# Altium PCB PCB Layout.PCBDOC
Units mil, origin at the board's own origin, x right, y up, seen from the top; angles counter-clockwise.
Board outline 4670 x 3220 mil, 2 copper layers (Top Layer, Bottom Layer); 42 components, 89 nets, 292 pads, 33 vias.
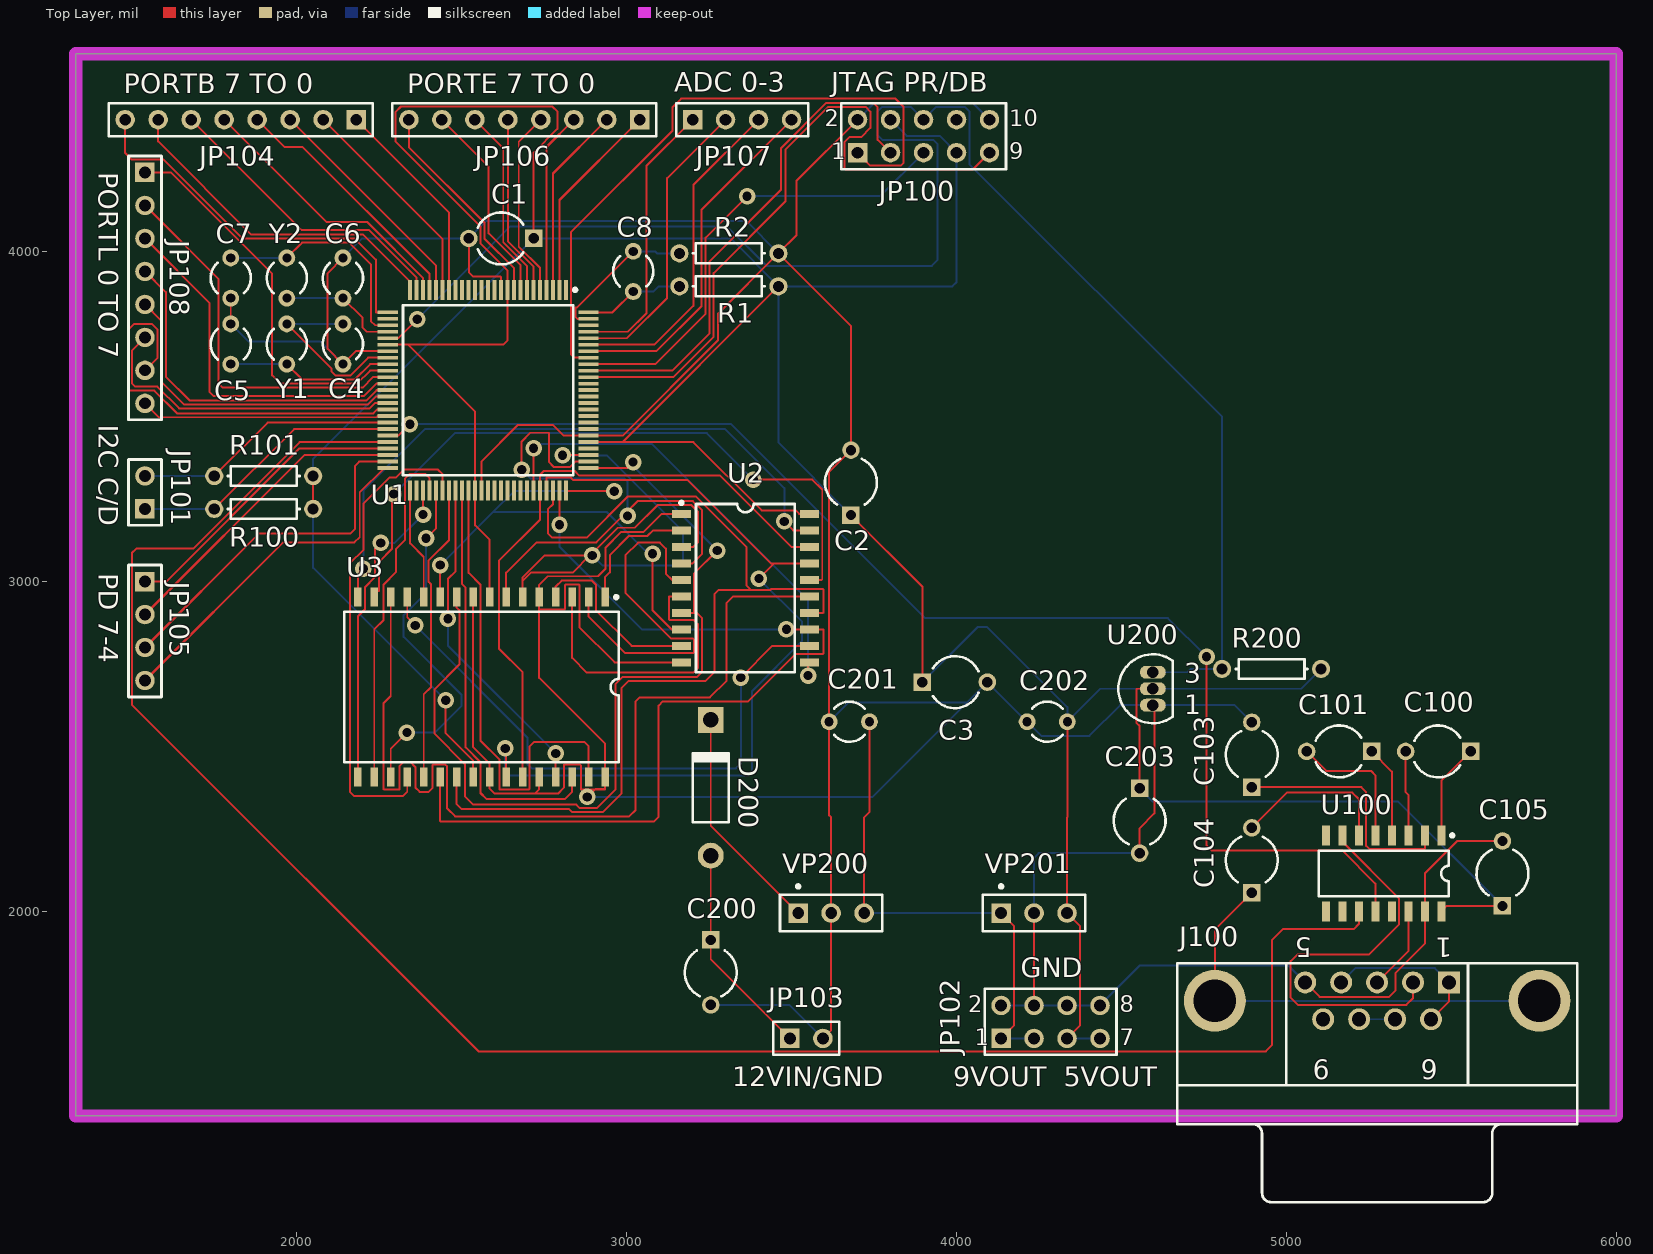
[diagram p0: Top Layer view]
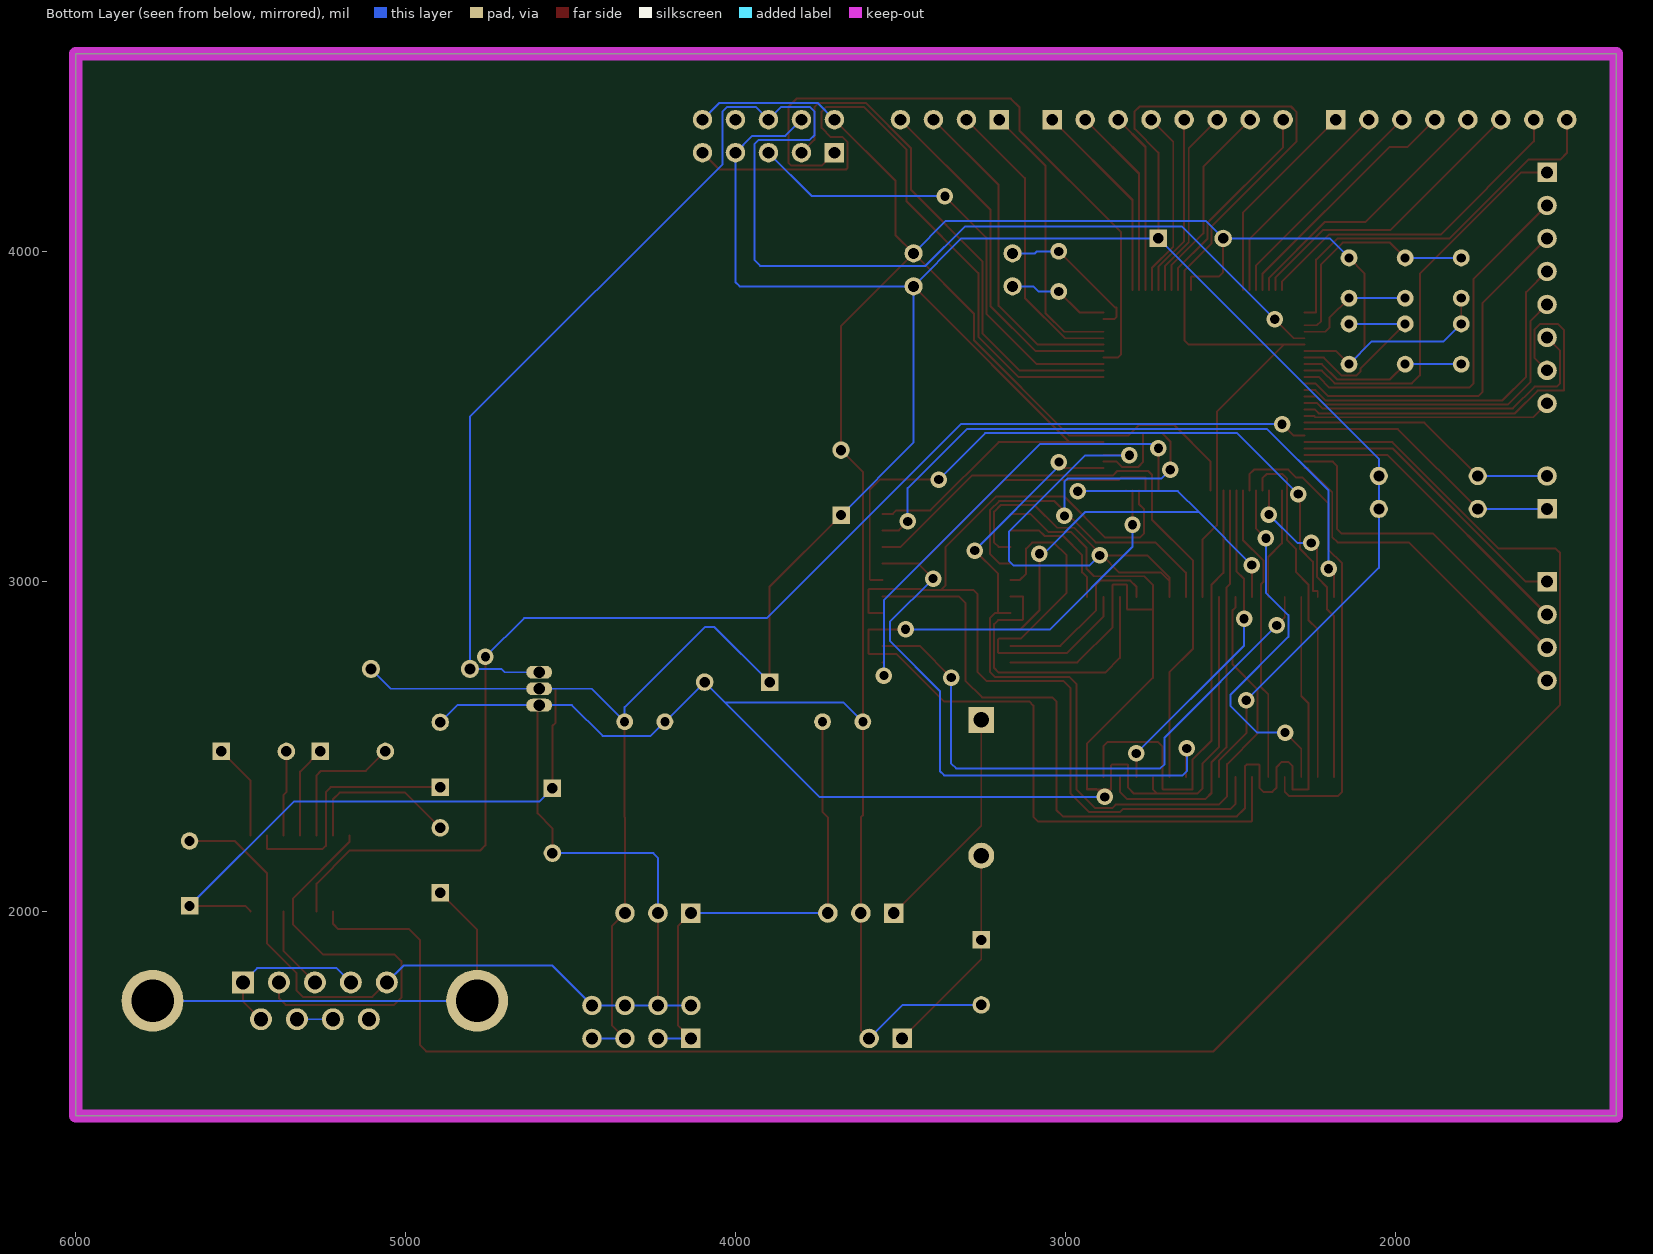
[diagram p1: Bottom Layer view, seen from below]

## Layer stack, top to bottom
Top Layer: signal copper 1.4
Dielectric: core 12.6, FR-4, Dk 4.8
Bottom Layer: signal copper 1.4

## Board outline
6000,4600 1330,4600 1330,1380 6000,1380

## Design rules (kind name [scope] priority, off if disabled: settings)
Clearance [All] p1: gap=6
ComponentClearance [All] p1: gap=10 collisioncheckmode=0
PolygonConnect [All] p1: connectstyle=Relief reliefconductorwidth=10 reliefentries=4 polygonreliefangle="90 Angle"
RoomDefinition "Interfaces and Connectors" [InComponentClass('Interfaces and Connectors')] p1 off: confinementstyle=ConfineIn formatcopy=TRUE outline 80,55 930,55 930,340 80,340
RoomDefinition "Power Regulation and Protection" [InComponentClass('Power Regulation and Protection')] p2 off: confinementstyle=ConfineIn formatcopy=TRUE outline 2050,75 3020,75 3020,270 2050,270
RoomDefinition "Microcontroller and Memory" [InComponentClass('Microcontroller and Memory')] p3 off: confinementstyle=ConfineIn formatcopy=TRUE outline 1015,60 2000,60 2000,245 1015,245
RoutingLayers [All] p1: top layer="Not Used" bottom layer="Not Used"
RoutingVias [All] p1: holewidth=28 width=50 viastyle="Through Hole" minholewidth=28 minwidth=50 maxholewidth=28 maxwidth=50
SolderMaskExpansion [All] p1: expansion=4
TestPointUsage [All] p1: valid=0 allowmultiple=FALSE
Testpoint [All] p1: side=15 testpointundercomponent=TRUE minsize=40 maxsize=100 preferedsize=60 minholesize=0 maxholesize=40 preferedholesize=32 testpointgrid=1 style=1023 order=-539222988
Width [All] p1: maxlimit=10 minlimit=6 preferedwidth=10 toplayer_maxwidth=6 toplayer_prefwidth=6 bottomlayer_maxwidth=6 bottomlayer_prefwidth=6 minimp=50.000000 maximp=50.000000 favimp=50.000000
16 further rules are at their usual default settings.

## Classes and differential pairs
component class "Interfaces and Connectors": C100 C101 C103 C104 C105 J100 JP100 JP101 JP102 JP103 JP104 JP105 JP106 JP107 JP108 R100 R101 U100
component class "Microcontroller and Memory": C1 C2 C3 C4 C5 C6 C7 C8 R1 R2 U1 U2 U3 Y1 Y2
component class "Power Regulation and Protection": C200 C201 C202 C203 D200 R200 U200 VP200 VP201
net class A[8..15]: A0 A1 A2 A3 A4 A5 A6 A7 A8 A9 A10 A11 A12 A13 A14 A15
net class AD[0..7]: AD0 AD1 AD2 AD3 AD4 AD5 AD6 AD7

## Components (designator, comment, footprint, x,y, rotation, side; value= is the part's Value field where it differs from the comment)
C1 "Cap Tant" CAPR5-4X5 2620,4040 r180 top
C2 "Cap Tant" CAPR5-4X5 3680,3300 r90 top
C3 "Cap Tant" CAPR5-4X5 3995,2695 r0 top
C4 "22pF" BCY-W2/D3.1 2140,3720 r180 top
C5 "22pF" BCY-W2/D3.1 1800,3720 r0 top
C6 "22pF" BCY-W2/D3.1 2140,3920 r0 top
C7 "22pF" BCY-W2/D3.1 1800,3920 r180 top
C8 "100nF" BCY-W2/D3.1 3020,3940 r180 top
C100 "Cap Elec" CAPR5-4X5 5460,2485 r180 top
C101 "Cap Elec" CAPR5-4X5 5160,2485 r180 top
C103 "Cap Elec" CAPR5-4X5 4895,2475 r90 top
C104 "Cap Elec" CAPR5-4X5 4895,2155 r90 top
C105 "Cap Elec" CAPR5-4X5 5655,2115 r90 top
C200 "Cap Elec" CAPR5-4X5 3255,1815 r270 top
C201 "100nF" BCY-W2/D3.1 3675,2575 r90 top
C202 "100nF" BCY-W2/D3.1 4275,2575 r90 top
C203 "Cap Elec" CAPR5-4X5 4555,2275 r270 top
D200 "1N4004" DIO10.46-5.3x2.8 3255,2375 r90 top
J100 "RS-232" DSUB1.385-2H9 5275,1355 r180 top
JP100 "JTAG" HDR2X5 3700,4300 r0 top
JP101 "I2C" HDR1X2 1540,3220 r90 top
JP102 "Voltage Outputs" HDR2X4 4135,1615 r0 top
JP103 "Voltage Input" HDR1X2 3495,1615 r0 top
JP104 "PORTB" HDR1X8 2180,4400 r180 top
JP105 "PORTD" HDR1X4 1540,3000 r270 top
JP106 "PORTE" HDR1X8 3040,4400 r180 top
JP107 "ADC Inputs" HDR1X4 3200,4400 r0 top
JP108 "PORTL" HDR1X8 1540,4240 r270 top
R1 "0K" AXIAL-0.3 3310,3895 r0 top
R2 "0K" AXIAL-0.3 3310,3995 r180 top
R100 "10K" AXIAL-0.3 1900,3220 r0 top
R101 "10K" AXIAL-0.3 1900,3320 r0 top
R200 "10K" AXIAL-0.3 4955,2735 r0 top
U1 "ATmega2560" F-QFP14X14-G100/Z17N 2580,3580 r270 top
U2 "74373" SO-G20/Y1.45 3360,2980 r270 top
U3 "K6R1008C1D" SO-G32/Y1.45 2560,2680 r180 top
U100 "MAX232" SO-G16/C5.85 5295,2115 r180 top
U200 "ZM33064" BCY-W3 4595,2675 r0 top
VP200 "7809" PIN3 3520,1995 r0 top
VP201 "7805" PIN3 4135,1995 r0 top
Y1 "16MHz" BCY-W2/D3.1 1970,3720 r0 top
Y2 "32kHz" BCY-W2/D3.1 1970,3920 r180 top

## Footprints (in the part's own frame and the unit in brackets; to place one, negate y for a bottom-side part, rotate by r counter-clockwise, add the part's x,y. Pads: shape width x height; smd on the part's side, far side on the other; paste and mask are expansions set on the pad)
AXIAL-0.3 [mm]
  round 1.4 hole 0.85: 1(-3.81,0) 2(3.81,0)
  silkscreen extent -2.77,-0.76 2.77,0.76
BCY-W2/D3.1 [mm]
  round 1.3 hole 0.7: 1(0,1.55) 2(0,-1.55)
  silkscreen extent -1.55,-1.19 1.55,1.17
BCY-W3 [mm]
  oval 2x1 hole 0.9: 1(0,-1.27) 2(0,0) 3(0,1.27)
  silkscreen extent -2.65,-2.65 1.55,2.65
CAPR5-4X5 [mm]
  rect 1.35x1.35 hole 0.8: 1(-2.5,0)
  round 1.35 hole 0.8: 2(2.5,0)
  silkscreen extent -1.69,-2 1.82,2
DIO10.46-5.3x2.8 [mm]
  round 2 hole 1.2: 1(-5.23,0)
  rect 2x2 hole 1.2: 2(5.23,0)
  silkscreen extent -2.65,-1.4 2.75,1.41
DSUB1.385-2H9 [mm] "Connector; D Subminiature; 9 Position; Right Angle; Pitch 1.385 mm"
  rect 1.69x1.69 hole 1.09: 1(-5.54,-10.92)
  round 1.69 hole 1.09: 2(-2.77,-10.92) 3(0,-10.92) 4(2.77,-10.92) 5(5.54,-10.92) 6(-4.155,-8.08) 7(-1.385,-8.08) 8(1.385,-8.08) 9(4.155,-8.08)
  round 4.76 hole 3.26: 10(-12.495,-9.5) 11(12.495,-9.5)
  silkscreen extent -15.4,-12.4 15.4,6
F-QFP14X14-G100/Z17N [mm]
  rect 1.55x0.3 smd: 1(-7.725,6) 2(-7.725,5.5) 3(-7.725,5) 4(-7.725,4.5) 5(-7.725,4) 6(-7.725,3.5) 7(-7.725,3) 8(-7.725,2.5) 9(-7.725,2) 10(-7.725,1.5) 11(-7.725,1) 12(-7.725,0.5) 13(-7.725,0) 14(-7.725,-0.5) 15(-7.725,-1) 16(-7.725,-1.5) 17(-7.725,-2) 18(-7.725,-2.5) 19(-7.725,-3) 20(-7.725,-3.5) 21(-7.725,-4) 22(-7.725,-4.5) 23(-7.725,-5) 24(-7.725,-5.5) 25(-7.725,-6) 51(7.725,-6) 52(7.725,-5.5) 53(7.725,-5) 54(7.725,-4.5) 55(7.725,-4) 56(7.725,-3.5) 57(7.725,-3) 58(7.725,-2.5) 59(7.725,-2) 60(7.725,-1.5) 61(7.725,-1) 62(7.725,-0.5) 63(7.725,0) 64(7.725,0.5) 65(7.725,1) 66(7.725,1.5) 67(7.725,2) 68(7.725,2.5) 69(7.725,3) 70(7.725,3.5) 71(7.725,4) 72(7.725,4.5) 73(7.725,5) 74(7.725,5.5) 75(7.725,6)
  rect 0.3x1.55 smd: 26(-6,-7.725) 27(-5.5,-7.725) 28(-5,-7.725) 29(-4.5,-7.725) 30(-4,-7.725) 31(-3.5,-7.725) 32(-3,-7.725) 33(-2.5,-7.725) 34(-2,-7.725) 35(-1.5,-7.725) 36(-1,-7.725) 37(-0.5,-7.725) 38(0,-7.725) 39(0.5,-7.725) 40(1,-7.725) 41(1.5,-7.725) 42(2,-7.725) 43(2.5,-7.725) 44(3,-7.725) 45(3.5,-7.725) 46(4,-7.725) 47(4.5,-7.725) 48(5,-7.725) 49(5.5,-7.725) 50(6,-7.725) 76(6,7.725) 77(5.5,7.725) 78(5,7.725) 79(4.5,7.725) 80(4,7.725) 81(3.5,7.725) 82(3,7.725) 83(2.5,7.725) 84(2,7.725) 85(1.5,7.725) 86(1,7.725) 87(0.5,7.725) 88(0,7.725) 89(-0.5,7.725) 90(-1,7.725) 91(-1.5,7.725) 92(-2,7.725) 93(-2.5,7.725) 94(-3,7.725) 95(-3.5,7.725) 96(-4,7.725) 97(-4.5,7.725) 98(-5,7.725) 99(-5.5,7.725) 100(-6,7.725)
  silkscreen extent -7.85,-6.55 6.55,6.83
HDR1X2 [mm]
  rect 1.5x1.5 hole 0.9: 1(0,0)
  round 1.5 hole 0.9: 2(2.54,0)
  silkscreen extent -1.27,-1.27 3.81,1.27
HDR1X4 [mm]
  rect 1.5x1.5 hole 0.9: 1(0,0)
  round 1.5 hole 0.9: 2(2.54,0) 3(5.08,0) 4(7.62,0)
  silkscreen extent -1.27,-1.27 8.89,1.27
HDR1X8 [mm]
  rect 1.5x1.5 hole 0.9: 1(0,0)
  round 1.5 hole 0.9: 2(2.54,0) 3(5.08,0) 4(7.62,0) 5(10.16,0) 6(12.7,0) 7(15.24,0) 8(17.78,0)
  silkscreen extent -1.27,-1.27 19.05,1.27
HDR2X4 [mm]
  rect 1.5x1.5 hole 0.9: 1(0,0)
  round 1.5 hole 0.9: 2(0,2.54) 3(2.54,0) 4(2.54,2.54) 5(5.08,0) 6(5.08,2.54) 7(7.62,0) 8(7.62,2.54)
  silkscreen extent -1.27,-1.27 8.89,3.81
HDR2X5 [mm]
  rect 1.5x1.5 hole 0.9: 1(0,0)
  round 1.5 hole 0.9: 2(0,2.54) 3(2.54,0) 4(2.54,2.54) 5(5.08,0) 6(5.08,2.54) 7(7.62,0) 8(7.62,2.54) 9(10.16,0) 10(10.16,2.54)
  silkscreen extent -1.27,-1.27 11.43,3.81
PIN3 [mm]
  rect 1.5x1.5 hole 0.9: 1(0,0)
  oval 1.51x1.5 hole 0.9: 2(2.54,0)
  round 1.5 hole 0.9: 3(5.08,0)
  silkscreen extent -1.4,-1.4 6.48,2.17
SO-G16/C5.85 [mm]
  rect 0.6x1.55 smd: 1(-4.445,-2.925) 2(-3.175,-2.925) 3(-1.905,-2.925) 4(-0.635,-2.925) 5(0.635,-2.925) 6(1.905,-2.925) 7(3.175,-2.925) 8(4.445,-2.925) 9(4.445,2.925) 10(3.175,2.925) 11(1.905,2.925) 12(0.635,2.925) 13(-0.635,2.925) 14(-1.905,2.925) 15(-3.175,2.925) 16(-4.445,2.925)
  silkscreen extent -5.4,-3.05 5,1.75
SO-G20/Y1.45 [mm]
  rect 0.6x1.45 smd: 1(-5.715,-4.925) 2(-4.445,-4.925) 3(-3.175,-4.925) 4(-1.905,-4.925) 5(-0.635,-4.925) 6(0.635,-4.925) 7(1.905,-4.925) 8(3.175,-4.925) 9(4.445,-4.925) 10(5.715,-4.925) 11(5.715,4.925) 12(4.445,4.925) 13(3.175,4.925) 14(1.905,4.925) 15(0.635,4.925) 16(-0.635,4.925) 17(-1.905,4.925) 18(-3.175,4.925) 19(-4.445,4.925) 20(-5.715,4.925)
  silkscreen extent -6.69,-5.05 6.47,3.8
SO-G32/Y1.45 [mm]
  rect 0.6x1.45 smd: 1(-9.525,-6.925) 2(-8.255,-6.925) 3(-6.985,-6.925) 4(-5.715,-6.925) 5(-4.445,-6.925) 6(-3.175,-6.925) 7(-1.905,-6.925) 8(-0.635,-6.925) 9(0.635,-6.925) 10(1.905,-6.925) 11(3.175,-6.925) 12(4.445,-6.925) 13(5.715,-6.925) 14(6.985,-6.925) 15(8.255,-6.925) 16(9.525,-6.925) 17(9.525,6.925) 18(8.255,6.925) 19(6.985,6.925) 20(5.715,6.925) 21(4.445,6.925) 22(3.175,6.925) 23(1.905,6.925) 24(0.635,6.925) 25(-0.635,6.925) 26(-1.905,6.925) 27(-3.175,6.925) 28(-4.445,6.925) 29(-5.715,6.925) 30(-6.985,6.925) 31(-8.255,6.925) 32(-9.525,6.925)
  silkscreen extent -10.58,-7.05 10.58,5.8

## Part data
C1 C2 C3 C100 C101 C103 C104 C105 C200 C203: library part "Cap Pol2", "Polarized Capacitor (Axial)"
C4 C5 C6 C7 C8 C201 C202: library part Cap, "Capacitor"
D200: library part "D Zener", "Zener Diode"
J100: library part "D Connector 9", "Receptacle Assembly, 9 Position, Right Angle"
JP100: library part "Header 5X2", "Header, 5-Pin, Dual row"
JP101 JP103: library part "Header 2", "Header, 2-Pin"
JP102: library part "Header 4X2", "Header, 4-Pin, Dual row"
JP104 JP106 JP108: library part "Header 8", "Header, 8-Pin"
JP105 JP107: library part "Header 4", "Header, 4-Pin"
R1 R2 R100 R101 R200: library part Res1, "Resistor"
U1: "Atmel ATmega2560 MCU"
U2: "Octal 8-bit D-type Latch"
U3: library part K6R1016C1D, "Samsung 128kBit High-Speed Static RAM"
U100: "Maxim RS-232 Transceiver"
U200: "Generic 5V Supply Voltage Monitor"
VP200: library part 7805, "Generic 6V Voltage Regulator"
VP201: "Generic 6V Voltage Regulator"
Y1 Y2: library part XTAL, "Crystal Oscillator"

## Via types
v1: diameter 50, hole 28, Top Layer to Bottom Layer, 33 vias

## Nets (pads, with @x,y where several pads share a name; then routed paths per layer and width w, separated by ;. In a path a pad name is that pad's centre, name@x,y a point inside that pad or via, vN(x,y) a via of type N, cw(c..) or ccw(c..) an arc to the next point about the centre after c; other vN are vias at no path point)
5V: C1.1 C2.1 C3.1 C105.1 C202.2 C203.1 JP100.4 JP100.7 JP102.5 JP102.7 R1.2 R100.2 R101.2 R200.2 U1.10 U1.31 U1.61 U1.80 U2.20 U3.8 U3.24 U100.16 U200.2 VP201.3 | length 14361.8
  Top Layer w6: R100.2 R101.2 ; U1.31 2337.83,3717.8 ; v1(2451.5,2640) 2451.5,2540.53 2535,2457.03 U3.24 ; U3.8 2585,3126 2540.63,3170.37 U1.61 2540.63,3515 2337.83,3717.8 ; C1.1 2718.43,4300.43 2790,4372 2790,4425 2775,4440 2316,4440 2300,4424 2300,4333.15 2557.15,4076 2557.15,4023.91 2639.06,3942 U1.10 2639.06,3731.06 2625.8,3717.8 2337.83,3717.8 ; U1.80 2987.52,3422.52 ; R1.2 2987.52,3422.52 ; U2.20 3523,3205 3512,3216 3409,3216 3202.48,3422.52 2987.52,3422.52 ; C2.1 3896.57,2985 C3.1 ; JP102.5 4374,1654 4374,1956 VP201.3 4335,2285 4336.02,2286.02 C202.2 ; C203.1 4555,2562 4546,2571 4546,2674 4547,2675 U200.2 ; U100.16 5486.73,2016.57 C105.1
  Bottom Layer w6: v1(2451.5,2640) 2050,3041.5 R100.2 R101.2 2050,3371.57 C1.1 3315,4040 R1.2 ; C2.1 3460,3421.57 R1.2 ; JP100.4 3849,4351 3949,4351 JP100.7 4000,3907.5 3987.5,3895 R1.2 ; C3.1 4063.57,2862 4093,2862 4336.02,2618.98 C202.2 4436.02,2675 U200.2 5045,2675 R200.2 ; JP102.5 JP102.7 ; C203.1 4595.43,2333 5338.57,2333 C105.1
9V: C201.2 JP102.1 JP102.3 VP200.3 VP201.1 | length 1513.9
  Top Layer w6: VP200.3 3720,2285 3736.02,2301.02 C201.2 ; JP102.1 4174,1654 4174,1956 VP201.1
  Bottom Layer w6: VP200.3 VP201.1 ; JP102.1 JP102.3
"10-12V IN": C200.1 D200.1 JP103.1 | length 653.5
  Top Layer w6: D200.1 C200.1 3255,1855 JP103.1
A0: U2.2 U3.1 | length 381.3
  Top Layer w6: U3.1 2935,3013.81 2949,3027.81 2949,3080 3007,3138 3063.08,3138 3080.08,3155 U2.2
A1: U2.5 U3.2 | length 1121.3
  Top Layer w6: U3.2 2885,2893.5 2995.5,2783 3201.65,2783 3203.65,2785 3203.65,2825 3201.65,2827 3135,2827 2996,2966 2996,3079 3035,3118 3101,3118 3119,3100 3119,3023.5 3137.5,3005 U2.5
A2: U2.6 U3.3 | length 922.7
  Top Layer w6: U3.3 2835,2768.5 2879.5,2724 3202.15,2724 3216,2737.85 3216,2871 3204,2883 3130.56,2883 3128.56,2885 3128.56,2954 3129.56,2955 U2.6
A3: U2.9 U3.4 | length 548.6
  Top Layer w6: U3.4 2785,2985 2803,3003 2895,3003 2907,2991 2907,2913 3015,2805 U2.9
A4: U2.12 U3.13 | length 1823.8
  Top Layer w6: U3.13 2335,2891.5 v1(2359.5,2867) ; v1(3346,2709) 3442,2805 U2.12
  Bottom Layer w6: v1(2359.5,2867) 2699.24,2527.26 2699.24,2446.63 2712.5,2433.38 3331.38,2433.38 3346,2448 v1(3346,2709)
A5: U2.15 U3.14 | length 2853.9
  Top Layer w6: U3.14 2285,2653 2263,2631 2263,2371 2265,2369 2310,2369 2311,2370 2311,2439.61 2325,2453.61 2343.89,2453.61 2360,2437.5 2360,2375 2372.5,2362.5 2399.5,2362.5 2412,2375 2412,2444 2413,2445 2450.5,2445 2456,2439.5 2456,2312 2480,2288 3007.5,2288 3027,2307.5 3027,2636.5 3039.5,2649 3252.5,2649 3303,2699.5 3303,2935 3323,2955 U2.15
A6: U2.16 U3.15 | length 2103.4
  Top Layer w6: U3.15 2235,2972 2249,2972 2250,2973 2250,3060.1 2288.5,3098.6 2288.5,3259.5 v1(2294,3265) ; v1(3384,3309) 3563,3309 3593,3279 3593,3007 3591,3005 U2.16
  Bottom Layer w6: v1(2294,3265) 2479,3450 3243,3450 v1(3384,3309)
A7: U2.19 U3.16 | length 1946.5
  Top Layer w6: U3.16 2185,3022 v1(2202,3039) ; v1(3478,3182) 3505,3155 U2.19
  Bottom Layer w6: v1(2202,3039) 2202,3276 2389,3463 3298,3463 3478,3283 v1(3478,3182)
A8: U1.53 U3.17 | length 975.5
  Top Layer w6: U3.17 2185,2894 2207,2916 2207,2983 2237,3013 2237,3099.5 v1(2254.5,3117) ; v1(2383.15,3203.15) U1.53
  Bottom Layer w6: v1(2254.5,3117) 2297,3117 v1(2383.15,3203.15)
A9: U1.54 U3.18 | length 1065.8
  Top Layer w6: U3.18 2235,2855 2263,2883 2263,2990.62 2300.5,3028.12 2300.5,3097.96 2328.87,3126.33 2328.87,3312.5 2342.37,3326 2389.33,3326 2402.83,3312.5 U1.54
A10: U1.55 U3.19 | length 1120.5
  Top Layer w6: U3.19 2285,2493 v1(2334,2542) ; v1(2392,3131) 2422.52,3161.52 U1.55
  Bottom Layer w6: v1(2334,2542) 2418,2542 2500,2624 2500,2656 2324,2832 2324,2898 2392,2966 v1(2392,3131)
A11: U1.56 U3.20 | length 1457.6
  Top Layer w6: U3.20 2335,2362.5 2322.5,2350 2173.5,2350 2161,2362.5 2161,3055 2203,3097 2203,3237.24 2280.76,3315 2300,3315 2324,3339 2428.2,3339 2442.2,3325 U1.56
A12: U1.57 U3.21 | length 906.2
  Top Layer w6: U3.21 2385,2658 2407,2680 2407,2992 2400,2999 2400,3064 2461.89,3125.89 U1.57
A13: U1.58 U3.29 | length 1013.3
  Top Layer w6: v1(2458.5,2887) 2458.5,3008.5 2481.57,3031.57 U1.58 ; U3.29 v1(2785,2479)
  Bottom Layer w6: v1(2458.5,2887) 2458.5,2805.5 v1(2785,2479)
A14: U1.59 U3.30 | length 1279.2
  Top Layer w6: U1.59 2501.26,2992 2512,2981.26 2512,2497 2557,2452 2557,2359 2575,2341 2813.5,2341 2835,2362.5 U3.30
A15: U1.60 U3.31 | length 1448.3
  Top Layer w6: U1.60 2520.94,3026.06 2557,2990 2557,2517.61 2614,2460.61 2614,2371.19 2615.37,2369.82 2704.63,2369.82 2706,2371.19 2706,2500 2719.81,2513.81 2871.19,2513.81 2885,2500 U3.31
AD0: U1.78 U2.3 U3.6 | length 2003.3
  Top Layer w6: U3.6 2685,3002 ; v1(2806,3382.5) 2806.65,3383.15 U1.78 ; v1(2896,3079) v1@2888.6,3079 ; U2.3 3202.65,3105 3215.65,3118 3215.65,3212.17 3195.81,3232 3094.27,3232 3025.27,3163 2972.6,3163 2892.3,3082.7 v1@2888.6,3079 ; 2685,3002 2685,3012.5 2751.5,3079 v1@2888.6,3079 ; 2685,3002 2711,3028 2837.6,3028 v1@2888.6,3079
  Bottom Layer w6: v1(2806,3382.5) 2939.5,3382.5 3171,3151 3171,3062.5 3156.5,3048 2927,3048 v1(2896,3079)
AD1: U1.77 U2.4 U3.7 | length 1830
  Top Layer w6: U3.7 2635,3027 2727,3119 2908,3119 v1@2988,3199 ; v1(2682,3339) 2682,3424.5 2708.5,3451 2763.3,3451 2764.3,3450 2764.3,3362.5 2779.8,3347 2828.16,3347 2844.62,3363.46 U1.77 ; v1(3003,3199) v1@2988,3199 ; U2.4 3200,3055 3228,3083 3228,3217 3201,3244 3033,3244 2995.5,3206.5 v1@2988,3199
  Bottom Layer w6: v1(2682,3339) 2708,3313 2992,3313 3003,3302 v1(3003,3199)
AD2: U1.76 U2.7 U3.10 | length 2737
  Top Layer w6: U3.10 2485,2921 2493,2913 2493,2748.5 2417,2672.5 2417,2539.44 2510,2446.44 2510,2349 2535,2324 2847.39,2324 2858.39,2313 2910.03,2313 2966,2368.97 2966,2688.69 2988.31,2711 3214,2711 3229,2726 3229,2888.5 3212.5,2905 3203,2905 ; U1.76 3001.28,3343.78 v1(3019.5,3362) ; U2.7 3203,2905 ; v1(3275,3094) 3204,3023 3204,2906 3203,2905
  Bottom Layer w6: v1(3019.5,3362) 3019.5,3349.5 v1(3275,3094)
AD3: U1.75 U2.8 U3.11 | length 1683.2
  Top Layer w6: U3.11 v1(2435,3050) ; U1.75 2816.22,3275 2961.5,3275 v1(2962.5,3274) ; v1(3078.5,3083.97) 3078.5,2912.5 3136,2855 U2.8
  Bottom Layer w6: v1(2435,3050) 2596,3211 ; v1(2962.5,3274) 2659,3274 2596,3211 ; v1(3078.5,3083.97) 3066,3083.97 2938.97,3211 2596,3211
AD4: U1.74 U2.13 U3.22 | length 2851.6
  Top Layer w6: U3.22 2435,2274 2436,2273 3083.5,2273 3097,2286.5 3097,2624 3110,2637 3368.5,2637 3512.5,2781 3596,2781 3597,2782 3597,2854 3596,2855 U2.13 v1(3484.5,2855) ; v1(2796.54,3172.46) U1.74
  Bottom Layer w6: v1(2796.54,3172.46) 2796.54,3104.98 3046.52,2855 v1(3484.5,2855)
AD5: U1.73 U2.14 U3.23 | length 2918.1
  Top Layer w6: U3.23 2485,2325 2500,2310 2826,2310 2835,2301 2927.82,2301 2984,2357.18 2984,2676.69 3005.31,2698 3237.81,2698 3266.5,2726.69 3266.5,2962.5 3278,2974 3377.35,2974 ; U1.73 2776.85,3234.85 2761,3219 2761,3146.8 2775,3132.8 2879.01,3132.8 3004.21,3258 3209.27,3258 3363.85,3103.42 3363.85,2987.5 3377.35,2974 ; U2.14 3596,2905 3597,2906 3597,2975 3595,2977 3437.7,2977 3434.7,2974 3377.35,2974
AD6: U1.72 U2.17 U3.26 | length 2624
  Top Layer w6: v1(2632,2494) 2635,2491 U3.26 ; U1.72 2757.17,3314 2758.54,3315.38 2830,3315.38 2836.93,3308.45 3184.05,3308.45 3437.5,3055 3447,3055 ; v1(3401,3009) 3447,3055 ; U2.17 3447,3055
  Bottom Layer w6: v1(2632,2494) 2632,2425 2644.5,2412.5 3367.5,2412.5 3380,2425 3380,2668 3531,2819 3531,2879 v1(3401,3009)
AD7: U1.71 U2.18 U3.27 | length 1913.9
  Top Layer w6: U3.27 2685,2725 2613,2797 2613,3063.02 2737.48,3187.5 U1.71 2737.48,3323.4 2749.08,3335 2842.5,3335 2856.5,3321 3283.4,3321 3499.4,3105 U2.18
ADC0: JP107.1 U1.97 | length 843.7
  Top Layer w6: U1.97 3003.71,3757.17 3060.21,3813.66 3060.21,4260.21 JP107.1
ADC1: JP107.2 U1.96 | length 903.2
  Top Layer w6: U1.96 3001,3737.48 3123,3859.48 3123,4223 JP107.2
ADC2: JP107.3 U1.95 | length 1013
  Top Layer w6: U1.95 3084,3717.8 3202,3835.8 3202,4202 JP107.3
ADC3: JP107.4 U1.94 | length 1077.6
  Top Layer w6: U1.94 3090.11,3698.11 3227,3835 3227,4127 JP107.4
AGND: C8.2 R2.2 U1.99 | length 457.5
  Top Layer w6: U1.99 2850.78,3796.54 2844.62,3802.69 2844.62,3829 2845.62,3830 2848.98,3830 C8.2
  Bottom Layer w6: C8.2 3086,4001.02 3092.02,3995 R2.2
ALE: U1.70 U2.11 | length 1434.1
  Top Layer w6: U1.70 v1(2717.8,3404) ; v1(3550,2715) 3550,2755 U2.11
  Bottom Layer w6: v1(2717.8,3404) 2730.8,3417 3076.29,3417 3550,2943.29 v1(3550,2715)
AVCC: C8.1 R1.1 U1.100 | length 308.5
  Top Layer w6: U1.100 2957.24,3816.22 C8.1
  Bottom Layer w6: C8.1 3081,3878.98 3097.02,3895 R1.1
GND: C1.2 C2.2 C3.2 C4.1 C5.1 C6.1 C7.1 C103.2 C105.2 C200.2 C201.1 C202.1 C203.2 J100.5 JP100.2 JP100.10 JP102.2 JP102.4 JP102.6 JP102.8 JP103.2 R2.1 U1.11 U1.32 U1.62 U1.81 U2.1 U2.10 U3.5 U3.9 U3.25 U3.28 U3.32 U100.15 U200.1 VP200.2 VP201.2 | length 16898.8
  Top Layer w6: C5.1 C7.1 ; C6.1 2093.41,3934.43 2093.41,3705.57 C4.1 2179.13,3698.11 U1.32 ; C1.2 2521.57,3937.5 2535.07,3924 2618.37,3924 2619.37,3923 U1.11 ; U3.9 2535,2498 2585,2448 U3.25 2585,2372 2600,2357 2722,2357 ; U1.62 2560.31,3364.55 2670.77,3475 2776.3,3475 2809.09,3442.2 U1.81 2988.01,3442.2 3277,3731.19 3277,3812 R2.1 ; U3.28 2735,2370 2722,2357 ; v1(2881,2347) 2903,2369 ; U2.10 2963.5,2755 2857,2861.5 2857,2989 2855,2991 2815,2991 2813,2989 2813,2916 2812,2915 2736,2915 2735,2916 ; U2.1 3106.08,3205 3051.82,3150.73 2984.27,3150.73 2936,3102.46 2936,3038.81 2913.19,3016 2761,3016 2735,2990 U3.5 2735,2916 ; JP103.2 3620,1640 VP200.2 3620,2285 3613.98,2291.02 C201.1 3613.98,3332.4 C2.2 3680,3775 R2.1 ; JP100.2 3515,4215 3515,4050 R2.1 ; JP102.4 VP201.2 ; C203.2 4555,2252 4600,2297 4600,2625 U200.1 ; J100.5 5100.81,1741 5311.5,1741 5330,1759.5 5330,1812 5420,1902 U100.15 5420,2115 5518.43,2213.43 C105.2 ; 2722,2357 2792,2357 2810,2375 2810,2444 2811,2445 2859,2445 2862,2442 2862,2370 2863,2369 2881,2369 2903,2369 ; 2735,2916 2735,2708 2935,2508 U3.32 2935,2372 ; 2903,2369 2934,2369 2935,2370 2935,2372 ; 2903,2369 2905,2371 2934,2371 2935,2372
  Bottom Layer w6: C5.1 1853.02,3728 2070.98,3728 C4.1 ; C6.1 2198.98,4040 C1.2 2574.57,4093 3362,4093 R2.1 ; v1(2881,2347) 3745.43,2347 4032.43,2634 ; C200.2 3493.43,1716.57 JP103.2 ; C201.1 3672.98,2634 4032.43,2634 ; JP100.2 3750.53,4450.53 4049.47,4450.53 JP100.10 ; C3.2 C3.2@4093.21,2694.79 ; JP102.2 JP102.4 JP102.6 JP102.8 4556,1836 5005.81,1836 J100.5 ; VP201.2 4235,2162.5 4249.07,2176.57 C203.2 ; C103.2 4843.43,2625 U200.1 4496,2625 4403,2532 4256.98,2532 C202.1 4213,2575 C3.2@4093.21,2694.79 ; 4032.43,2634 C3.2@4093.21,2694.79
NetC100_1: C100.1 U100.1 | length 291.5
  Top Layer w6: U100.1 5470,2396.57 C100.1
NetC100_2: C100.2 U100.3 | length 258.3
  Top Layer w6: C100.2 5361.57,2361.43 5370,2353 U100.3
NetC101_1: C101.1 U100.4 | length 280.3
  Top Layer w6: C101.1 5320,2423.43 U100.4
NetC101_2: C101.2 U100.5 | length 420.8
  Top Layer w6: C101.2 5120.57,2426 5256.5,2426 5270,2412.5 U100.5
NetC103_1: C103.1 U100.2 | length 738.5
  Top Layer w6: C103.1 5226.93,2376.57 5242,2361.5 5242,2199 5252,2189 5419,2189 5420,2190 U100.2
NetC104_1: C104.1 J100.10 J100.11 | length 1357.8
  Top Layer w6: J100.11 4783.07,1944.64 C104.1
  Bottom Layer w6: J100.11 J100.10
NetC104_2: C104.2 U100.6 | length 487.3
  Top Layer w6: C104.2 5001.57,2360 5200,2360 5220,2340 U100.6
NetD200_2: D200.2 VP200.1 | length 695.7
  Top Layer w6: D200.2 3255,2260 VP200.1
NetJ100_1: J100.1 J100.4 J100.6 | length 497.2
  Top Layer w6: J100.6 5493.11,1727.64 J100.1
  Bottom Layer w6: J100.4 5209.02,1828 5450.03,1828 J100.1
NetJ100_2: J100.2 U100.7 | length 1262.2
  Top Layer w6: U100.7 5170,2211 5342,2039 5342,1961 5250,1869 5033,1869 5013,1849 5013,1738.5 5034.5,1717 5363.56,1717 5384.06,1737.5 J100.2
NetJ100_3: J100.3 U100.14 | length 254.3
  Top Layer w6: J100.3 5370,1879.92 U100.14
NetJ100_7: J100.7 J100.8 | length 109.1
  Bottom Layer w6: J100.8 J100.7
PB0: JP104.1 U1.19 | length 632.6
  Top Layer w6: JP104.1 2461.89,4118.11 U1.19
PB1: JP104.2 U1.20 | length 665.9
  Top Layer w6: JP104.2 2442.2,4037.8 U1.20
PB2: JP104.3 U1.21 | length 699.2
  Top Layer w6: JP104.3 2422.52,3957.48 U1.21
PB3: JP104.4 U1.22 | length 764.6
  Top Layer w6: JP104.4 1963,4317 2018,4317 2402.83,3932.17 U1.22
PB4: JP104.5 U1.23 | length 837.8
  Top Layer w6: JP104.5 2090,4090 2213,4090 2383.15,3919.85 U1.23
PB5: JP104.6 U1.24 | length 918.7
  Top Layer w6: JP104.6 2015,4065 2219.42,4065 2363.46,3920.96 U1.24
PB6: JP104.7 U1.25 | length 1030.7
  Top Layer w6: JP104.7 1580,4334 1862.38,4051.62 2201.16,4051.62 2343.78,3909 U1.25
PB7: JP104.8 U1.26 | length 1189.6
  Top Layer w6: JP104.8 1480,4299 1499,4280 1596,4280 1836.38,4039.62 2175.89,4039.62 2240,3975.51 2240,3817.22 2241,3816.22 U1.26
PD4: JP105.1 U1.47 | length 902.7
  Top Layer w6: JP105.1 1604,3000 2006.83,3402.83 U1.47
PD5: JP105.2 U1.48 | length 936
  Top Layer w6: JP105.2 2023.15,3383.15 U1.48
PD6: JP105.3 U1.49 | length 1081.4
  Top Layer w6: JP105.3 1885,3145 2162.5,3145 2176,3158.5 2176,3350 2189.46,3363.46 U1.49
PD7: JP105.4 U1.50 | length 1081.9
  Top Layer w6: JP105.4 1958.5,3118.5 2175,3118.5 2191,3134.5 2191,3270.02 2264.76,3343.78 U1.50
PE0: JP106.1 U1.2 | length 616.7
  Top Layer w6: U1.2 2796.54,4156.54 JP106.1
PE1: JP106.2 U1.3 | length 583.4
  Top Layer w6: U1.3 2776.85,4236.85 JP106.2
PE2: JP106.3 U1.4 | length 550.2
  Top Layer w6: U1.4 2757.17,4317.17 JP106.3
PE3: JP106.4 U1.5 | length 570.3
  Top Layer w6: U1.5 2737.48,3950.84 2673,4015.32 2673,4333 JP106.4
PE4: JP106.5 U1.6 | length 548.1
  Top Layer w6: JP106.5 2640,4031.35 2717.8,3953.55 U1.6
PE5: JP106.6 U1.7 | length 581.4
  Top Layer w6: JP106.6 2626,4314 2626,4028.38 2698.11,3956.27 U1.7
PE6: JP106.7 U1.8 | length 614.6
  Top Layer w6: JP106.7 2582,4258 2582,4055.4 2678.43,3958.98 U1.8
PE7: JP106.8 U1.9 | length 647.9
  Top Layer w6: JP106.8 2340,4316.73 2569.15,4087.58 2569.15,4039.65 2658.74,3950.06 U1.9
PL0: JP108.1 U1.35 | length 1197
  Top Layer w6: JP108.1 1617.84,4240 1925.26,3932.58 1925.26,3625 1949.88,3600.38 2183.77,3600.38 2222.44,3639.06 U1.35
PL1: JP108.2 U1.36 | length 1163
  Top Layer w6: JP108.2 1762.5,3917.5 1762.5,3600.88 1775.38,3588 2199.63,3588 2231,3619.37 U1.36
PL2: JP108.3 U1.37 | length 1107.6
  Top Layer w6: JP108.3 1735,3845 1735,3575 1748,3562 2203.35,3562 2241.04,3599.69 U1.37
PL3: JP108.4 U1.38 | length 1060.3
  Top Layer w6: JP108.4 1603,3877 1603,3621.16 1674.9,3549.26 2211.61,3549.26 2242.35,3580 U1.38
PL4: JP108.5 U1.39 | length 979.1
  Top Layer w6: JP108.5 1590.53,3789.47 1590.53,3604.68 1657.94,3537.26 2216.59,3537.26 2239.64,3560.31 U1.39
PL5: JP108.6 U1.40 | length 969.4
  Top Layer w6: JP108.6 1500,3700 1500,3601 1510,3591 1577.56,3591 1643.56,3525 2221.3,3525 2236.93,3540.63 U1.40
PL6: JP108.7 U1.41 | length 1246.8
  Top Layer w6: JP108.7 1578.53,3678.53 1578.53,3762.97 1561.5,3780 1506.5,3780 1488,3761.5 1488,3580.53 1490,3578.53 1568.46,3578.53 1636.99,3510 2232.06,3510 2243,3520.94 U1.41
PL7: JP108.8 U1.42 | length 754.6
  Top Layer w6: JP108.8 1582,3498 2242.08,3498 2245.34,3501.26 U1.42
RESET: JP100.6 R200.1 U1.30 U200.3 | length 5023.4
  Top Layer w6: U1.30 2307.48,3737.48 v1(2365,3795)
  Bottom Layer w6: v1(2365,3795) 2646,4076 3305,4076 3424,3957 3925,3957 3943,3975 3943,4325 3929.47,4338.53 3775,4338.53 3760,4353.53 3760,4424 3774.53,4438.53 3861.47,4438.53 JP100.6 3938.53,4438.53 4025.47,4438.53 4039,4425 4039,4265 4805,3499 R200.1 4710,2735 4700,2725 U200.3
RXD: U1.45 U100.12 | length 4004.9
  Top Layer w6: U1.45 2308.2,3442.2 v1(2343,3477) ; v1(4758,2772) 4758,2200 4773,2185 5169.24,2185 5270,2084.24 U100.12
  Bottom Layer w6: v1(2343,3477) 3316.79,3477 3904.79,2889 4641,2889 v1(4758,2772)
SCL: JP101.2 R101.1 U1.43 | length 802.8
  Top Layer w6: R101.1 1911.57,3481.57 U1.43
  Bottom Layer w6: JP101.2 R101.1
SDA: JP101.1 R100.1 U1.44 | length 836.1
  Top Layer w6: R100.1 1991.89,3461.89 U1.44
  Bottom Layer w6: JP101.1 R100.1
TCK: JP100.1 U1.93 | length 1983.8
  Top Layer w6: U1.93 2841,3678.43 2832,3687.43 2832,4060 3139,4367 3139,4437.5 3165.5,4464 3815,4464 3839,4440 3839,4268.47 3831.53,4261 3739,4261 JP100.1
TDI: JP100.9 U1.90 | length 2092.6
  Top Layer w6: U1.90 3141.33,3619.37 3264,3742.04 3264,3935 3481,4152 3481,4308.45 3611.55,4439 3724.53,4439 3739,4424.53 3739,4375 3711,4347 3675,4347 3660,4332 3660,4254 3665,4249 4049,4249 JP100.9
TDO: JP100.3 U1.91 | length 1574.2
  Top Layer w6: U1.91 3138.06,3639.06 3251.5,3752.5 3251.5,3970.5 3468,4187 3468,4313.51 3605.49,4451 3747.5,4451 3761,4437.5 3761,4339 JP100.3
TMS: JP100.5 U1.92 | length 1416.5
  Top Layer w6: U1.92 3086.27,3658.74 3239.5,3811.97 3239.5,4042.5 v1(3365,4168)
  Bottom Layer w6: v1(3365,4168) 3768,4168 JP100.5
TOSC1: C6.2 U1.29 Y2.1 | length 365.2
  Top Layer w6: C6.2 2200,3798.98 2200,3769.67 2212.5,3757.17 U1.29
  Bottom Layer w6: Y2.1 C6.2
TOSC2: C7.2 U1.28 Y2.2 | length 699.3
  Top Layer w6: Y2.2 2015.98,4027 2159.42,4027 2225,3961.42 2225,3789.35 2237.5,3776.85 U1.28
  Bottom Layer w6: C7.2 Y2.2
TXD: U1.46 U100.11 | length 5913.6
  Top Layer w6: U1.46 2009.08,3422.52 1686.56,3100 1513.5,3100 1500,3086.5 1500,2627 2551,1576 4937.5,1576 4956,1594.5 4956,1912.5 4989.5,1946 5203.5,1946 5220,1962.5 U100.11
WR*: U1.51 U3.12 | length 340.3
  Top Layer w6: U1.51 2343.78,3115.53 2385,3074.31 U3.12
XTAL1: C5.2 U1.34 Y1.2 | length 514.4
  Top Layer w6: Y1.2 2016.59,3612.38 2175.9,3612.38 2222.25,3658.74 U1.34
  Bottom Layer w6: C5.2 Y1.2
XTAL2: C4.2 U1.33 Y1.1 | length 568.1
  Top Layer w6: Y1.1 2105,3646.02 2105,3637.5 2118.12,3624.38 2162.5,3624.38 2216.54,3678.43 U1.33
  Bottom Layer w6: Y1.1 C4.2
pads on no net: J100.9 JP100.8 U1.1 U1.12 U1.13 U1.14 U1.15 U1.16 U1.17 U1.18 U1.27 U1.52 U1.63 U1.64 U1.65 U1.66 U1.67 U1.68 U1.69 U1.79 U1.82 U1.83 U1.84 U1.85 U1.86 U1.87 U1.88 U1.89 U1.98 U100.8 U100.9 U100.10 U100.13

## Keep-outs
Keep-Out Layer:
  the board outline again, w40

## Silkscreen, mask and mechanical layers (free items; w line width, h text height)
Top Overlay:
  text "ADC 0-3" at 3145,4485 h60
  text "JTAG PR/DB" at 3620,4485 h60
  text "PORTB 7 TO 0" at 1475,4480 h60
  text "PORTE 7 TO 0" at 2335,4480 h60
  text "PORTL 0 TO 7" at 1400,4240 h60 r270
  text "I2C C/D" at 1400,3475 h60 r270
  text "PD 7-4" at 1400,3025 h60 r270
  text "GND" at 4195,1800 h60
  text "12VIN/GND" at 3320,1470 h60
  text "9VOUT" at 3990,1470 h60
  text "5VOUT" at 4325,1470 h60

## Dimensions
6000,1380 to 6000,4600 on Keep-Out Layer
6000,4600 to 1330,4600 on Keep-Out Layer

## Text inside footprints (layer, text, board x,y; h text height)
J100: Top Overlay "6" at 5458.27,1550.87 h59.06 r180; Top Overlay "9" at 5131.1,1550.87 h59.06 r180; Top Overlay "5" at 5076.57,1920.94 h59.06 r180; Top Overlay "1" at 5502.95,1920.94 h59.06 r180
JP100: Top Overlay "2" at 3600,4380 h50; Top Overlay "1" at 3620,4280 h50; Top Overlay "9" at 4160,4280 h50; Top Overlay "10" at 4160,4380 h50
JP102: Top Overlay "2" at 4035,1695 h50; Top Overlay "1" at 4055,1595 h50; Top Overlay "7" at 4495,1595 h50; Top Overlay "8" at 4495,1695 h50
U200: Top Overlay "1" at 4690.31,2597.09 h59.05; Top Overlay "3" at 4690.31,2693.39 h59.05